# Altium PCB ESC.PcbDoc
Units mm, origin at the board's own origin, x right, y up, seen from the top; angles counter-clockwise.
Board outline 52 x 30 mm, 4 copper layers (Top Layer, Layer 1, Layer 2, Bottom Layer), stack 0.603 mm thick; 61 components, 53 nets, 200 pads, 135 vias.
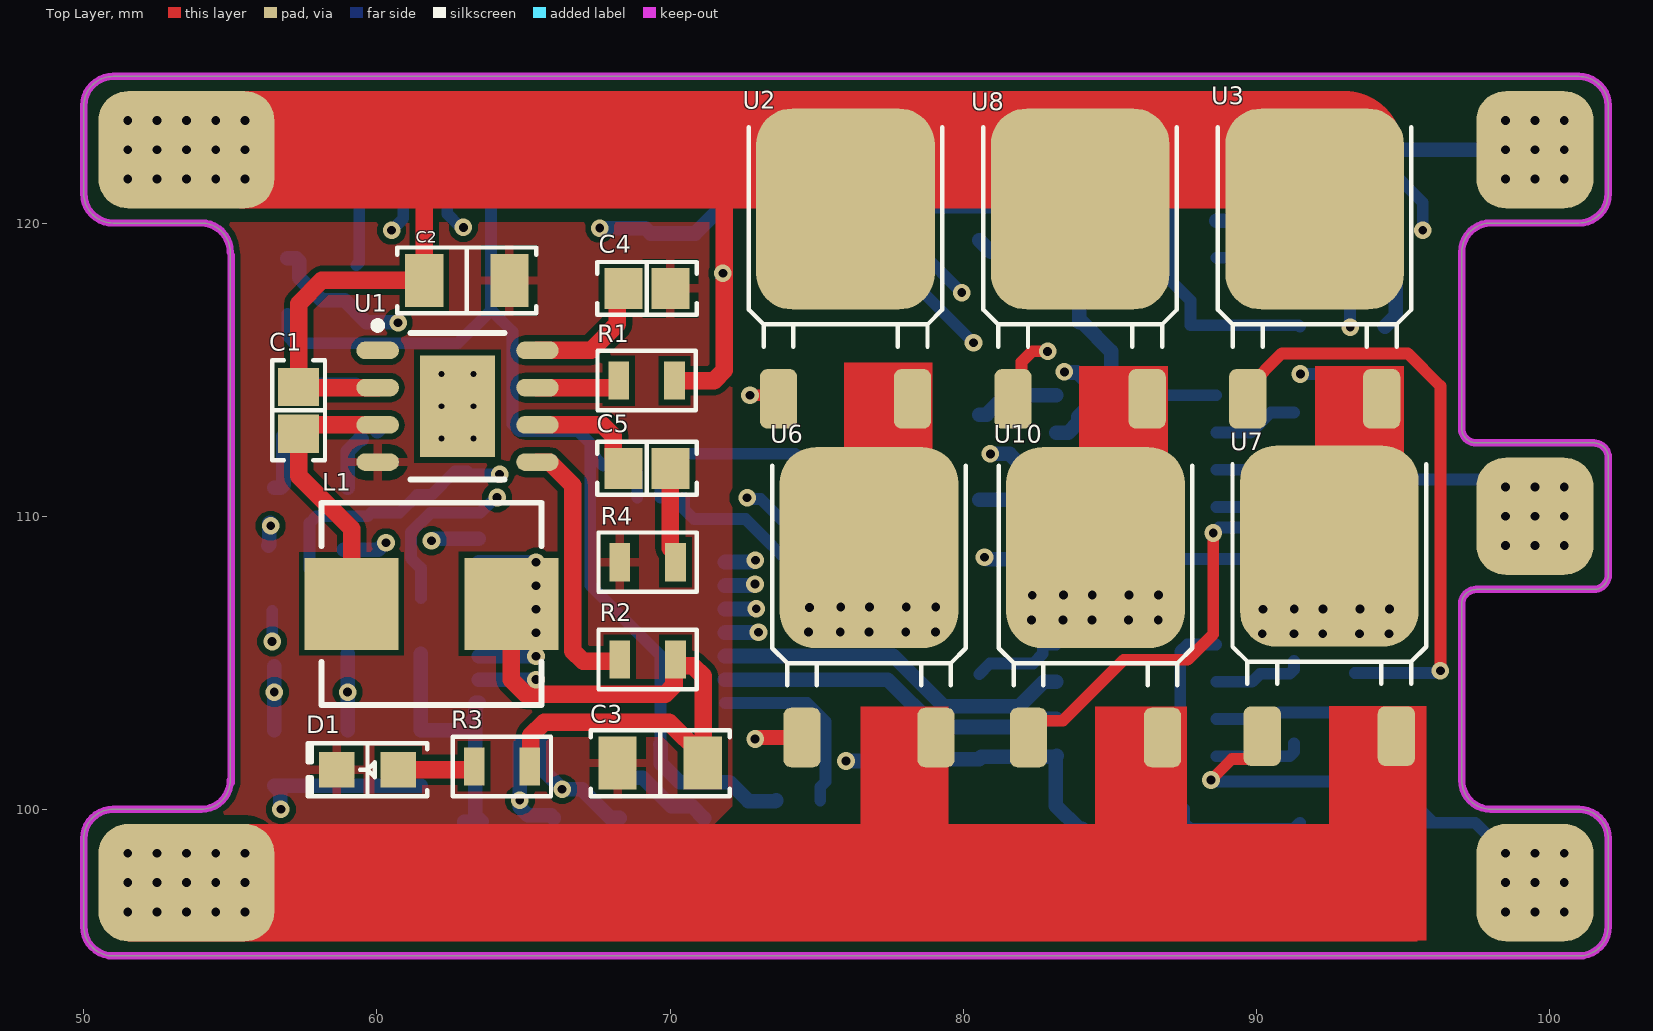
[diagram p0: Top Layer view]
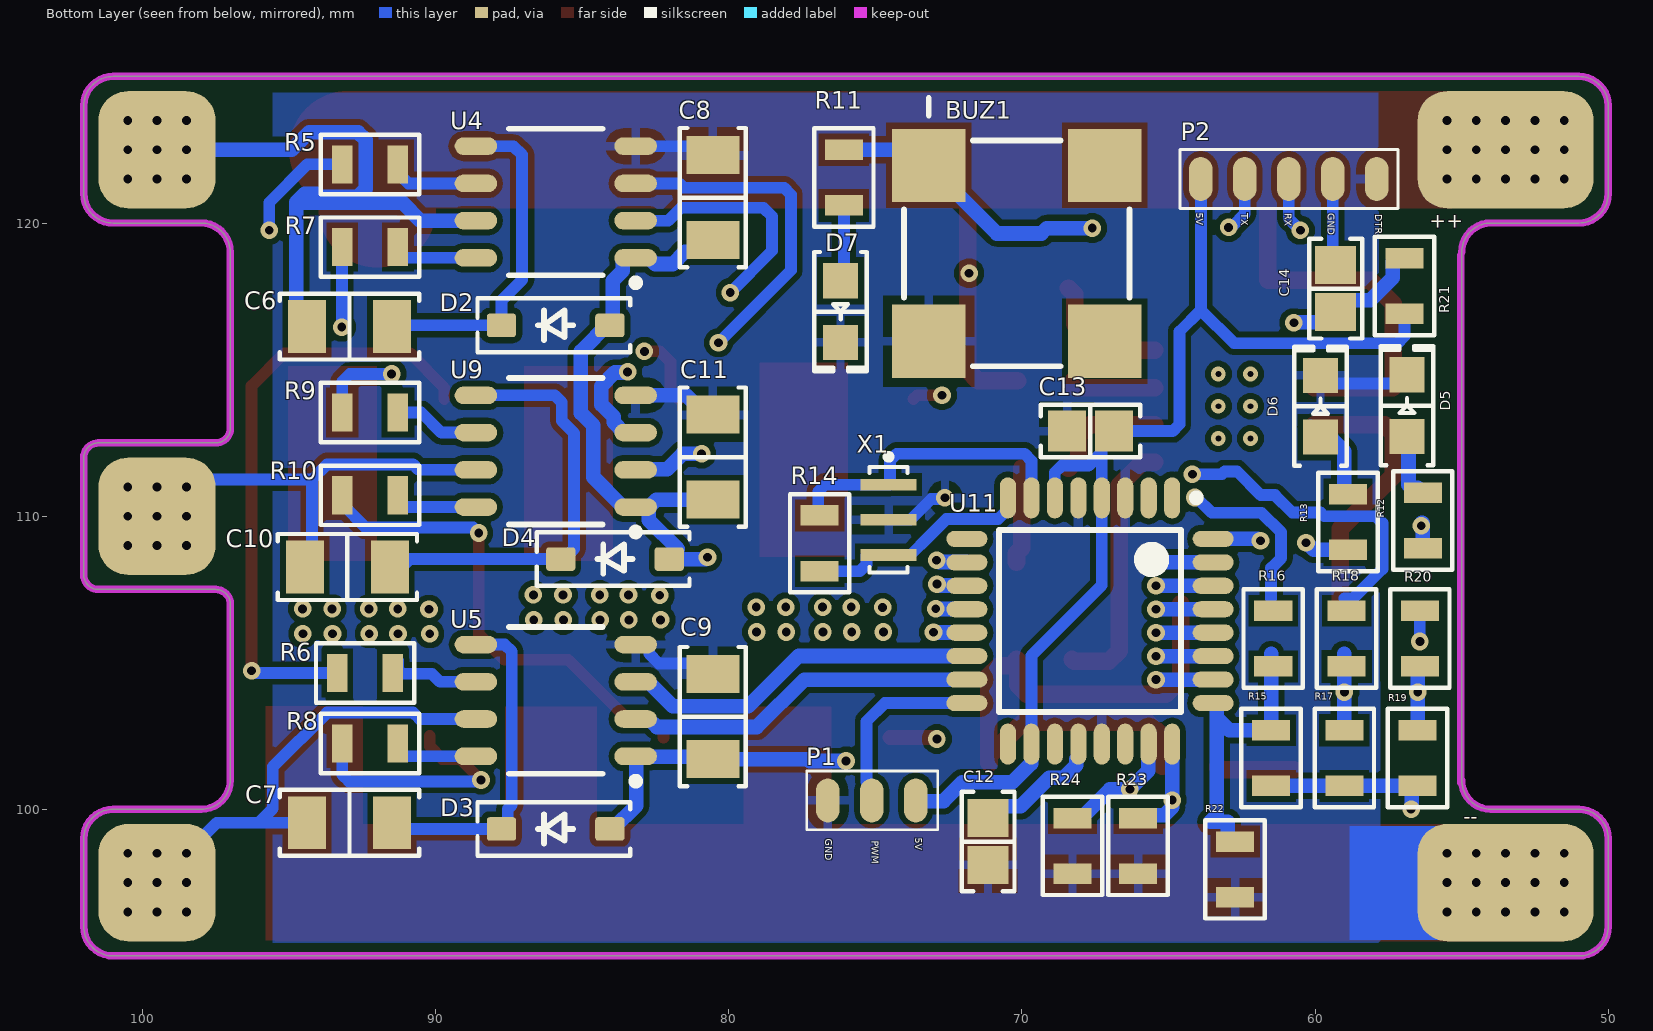
[diagram p1: Bottom Layer view, seen from below]
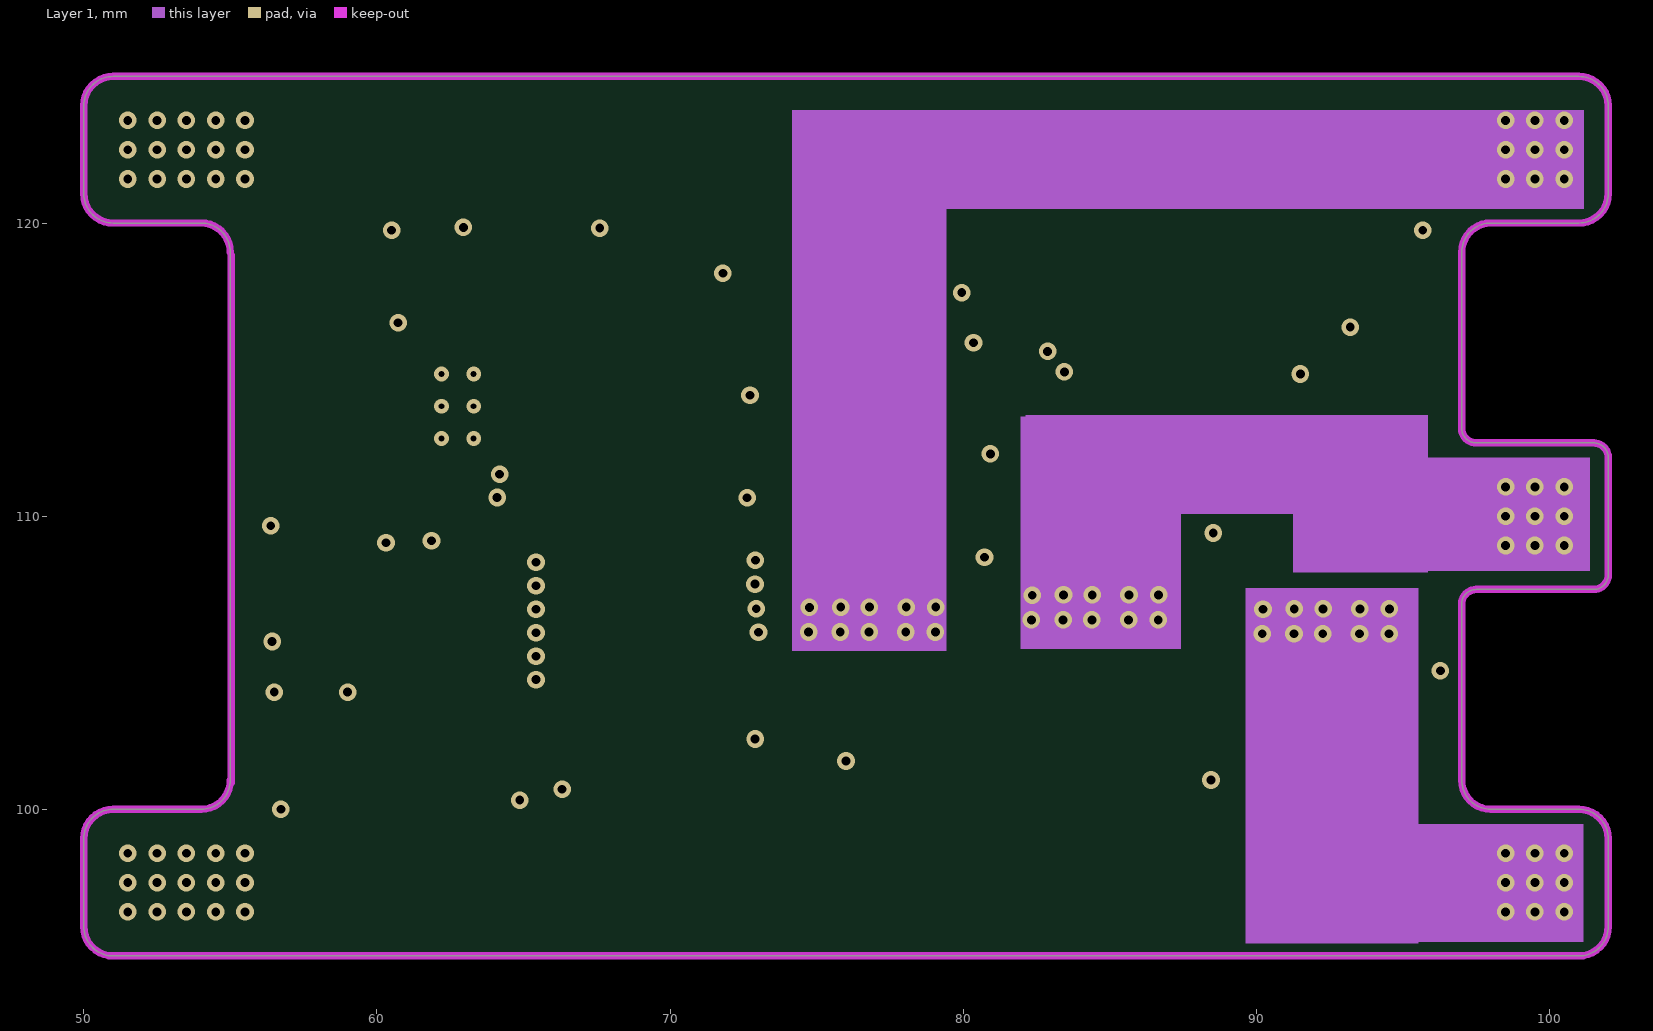
[diagram p2: Layer 1]
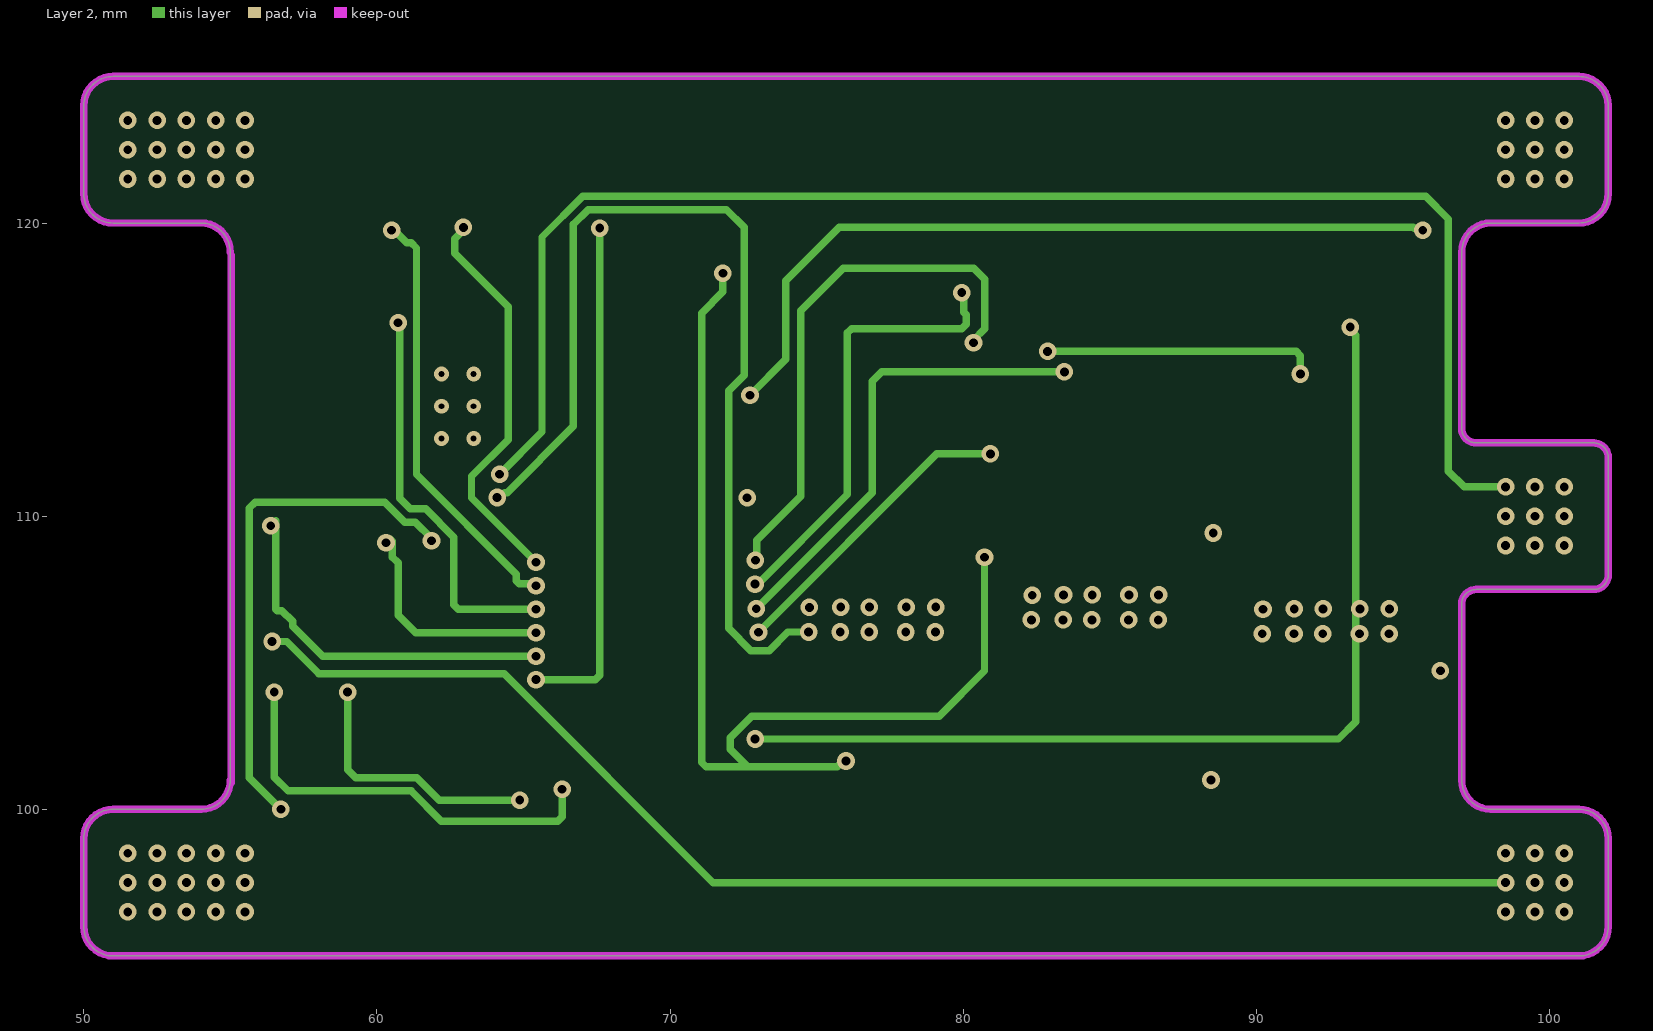
[diagram p3: Layer 2]
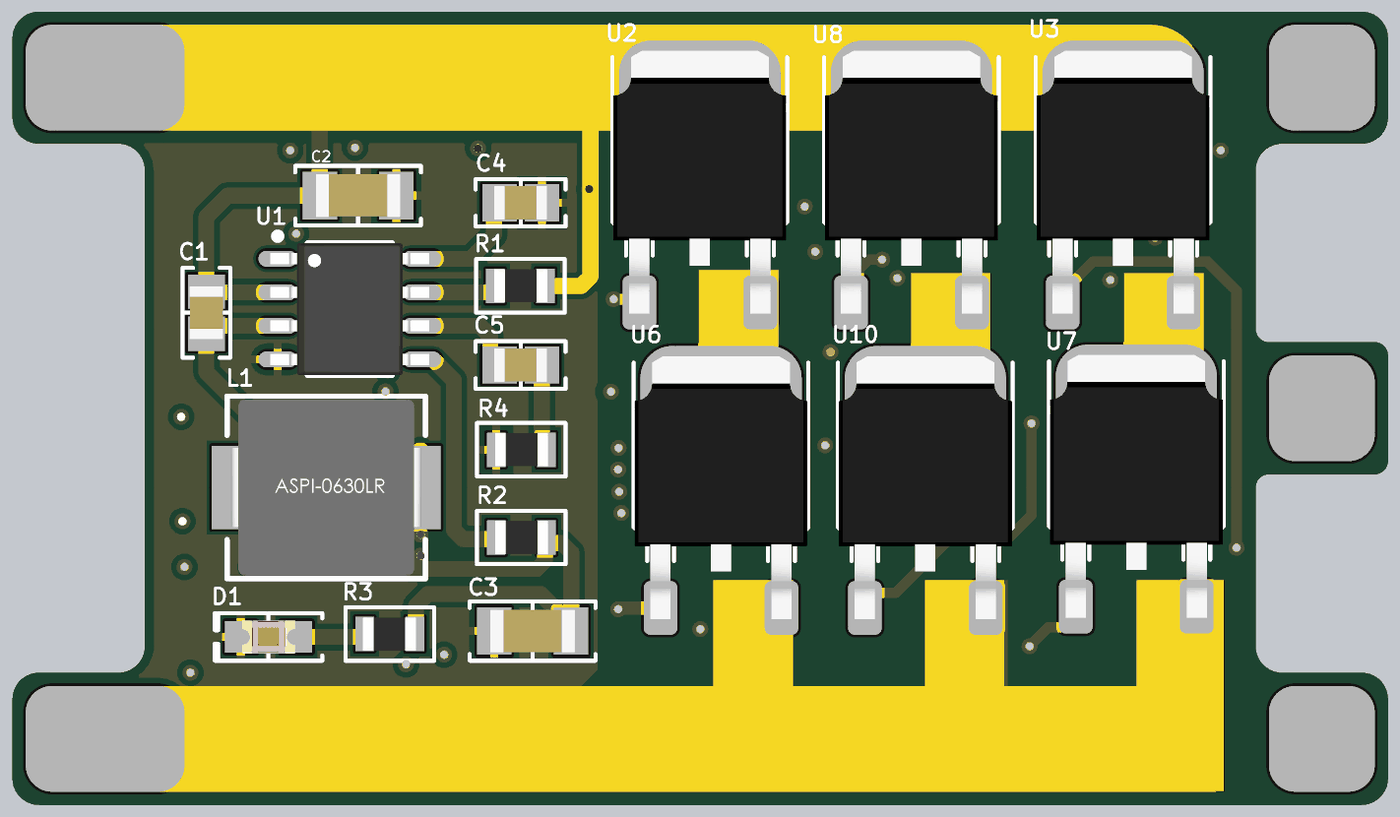
[diagram p4: 3D render of the assembled board from above, using the file's embedded part models]
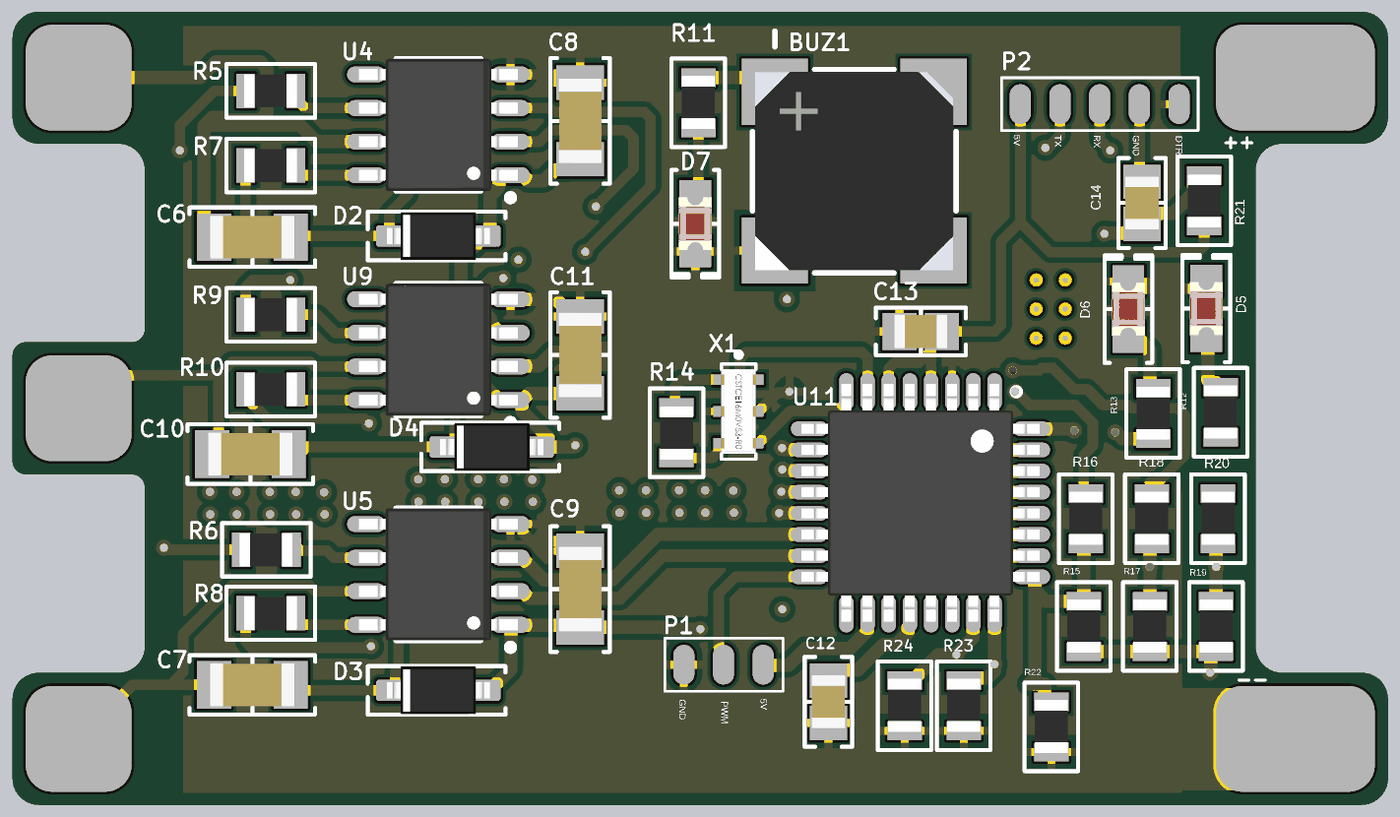
[diagram p5: 3D render of the assembled board from below, using the file's embedded part models]

## Layer stack, top to bottom
Top Solder: solder mask 0.0102, Solder Resist, Dk 3.5
Top Layer: signal copper 0.0356
Dielectric 2: prepreg 0.0711, PP-006, Dk 4.1
Layer 1: signal copper 0.035
Dielectric 1: dielectric 0.32, FR-4, Dk 4.8
Layer 2: signal copper 0.035
Dielectric 3: prepreg 0.0711, PP-006, Dk 4.1
Bottom Layer: signal copper 0.0356
Bottom Solder: solder mask 0.0102, Solder Resist, Dk 3.5

## Board outline
50,96 50,99 cw(c51,99) 51,100 54,100 ccw(c54,101) 55,101 55,119 ccw(c54,119) 54,120 51,120 cw(c51,121) 50,121 50,124 cw(c51,124) 51,125 101,125 cw(c101,124) 102,124 102,121 cw(c101,121) 101,120 98,120 ccw(c98,119) 97,119 97,113 ccw(c97.5,113) 97.5,112.5 101.5,112.5 cw(c101.5,112) 102,112 102,108 cw(c101.5,108) 101.5,107.5 97.5,107.5 ccw(c97.5,107) 97,107 97,101 ccw(c98,101) 98,100 101,100 cw(c101,99) 102,99 102,96 cw(c101,96) 101,95 51,95 cw(c51,96)

## Design rules (kind name [scope] priority, off if disabled: settings)
Clearance "Stitching GND" [IsStitchingVia and InNet('GND') vs (IsVia and (Not IsStitchingVia)) Or IsPad] p1: gap=0.127 ignorepadtopadclearanceinfootprint=FALSE
Clearance [All] p2: gap=0.2 ignorepadtopadclearanceinfootprint=FALSE
PolygonConnect [All] p1: connectstyle=Relief reliefconductorwidth=0.3 reliefentries=4 polygonreliefangle="90 Angle" airgapwidth=0.3
RoutingVias [All] p1: holewidth=0.3 width=0.6 viastyle="Through Hole" minholewidth=0.25 minwidth=0.5 maxholewidth=2.5 maxwidth=5
ShortCircuit [All] p1: allowed=TRUE
SolderMaskExpansion [All] p1: expansion=0.102 istentingtop=FALSE
SupplyNets "Schematic Supply Nets_3" [InNet('+5V')] p1: voltage=0.000
SupplyNets "Schematic Supply Nets_2" [InNet('VCC')] p2: voltage=0.000
SupplyNets "Schematic Supply Nets_1" [InNet('+5')] p3: voltage=0.000
SupplyNets "Schematic Supply Nets" [InNet('GND')] p4: voltage=0.000
Width [All] p1: maxlimit=10 minlimit=0.1 preferedwidth=0.3 midlayer1_minwidth=0.254 midlayer1_maxwidth=0.254 midlayer1_prefwidth=0.254 midlayer2_minwidth=0.254 midlayer2_maxwidth=0.254 midlayer2_prefwidth=0.254 minimp=50.000000 maximp=50.000000 favimp=50.000000
29 further rules are at their usual default settings.

## Classes and differential pairs
component class Power: C1 C2 C3 C4 C5 D1 L1 R1 R2 R3 R4 U1
component class MCU: BUZ1 C12 C13 C14 D5 D6 D7 P1 P2 R11 R12 R13 R14 R15 R16 R17 R18 R19 R20 R21 R22 R23 R24 U11 X1
component class Driver: C6 C7 C8 C9 C10 C11 D2 D3 D4 R5 R6 R7 R8 R9 R10 U2 U3 U4 U5 U6 U7 U8 U9 U10

## Components (designator, comment, footprint, x,y, rotation, side; value= is the part's Value field where it differs from the comment)
BUZ1 "BUZZER MAGN 3.6V 7.5X7.5MM SMD" "BUZ: CMT-7525" 70,119 r270 bottom
C1 "CAP CER 10000PF 50V X7R 0805" CAP-0805(2012) 57.35,113.625 r270 top
C2 "CAP CER 10UF 50V X5R 1206" "CAP 1206/3216" 63,118 r180 top
C3 "CAP CERAMIC 22UF 16V X7S 20% PAD" "CAP 1206/3216" 69.728,101.618 r0 top
C4 "CAP CER 0.1UF 50V X7R 0805" CAP-0805(2012) 69.223,117.75 r180 top
C5 "CAP CER 3900PF 50V X7R 0805" CAP-0805(2012) 69.223,111.613 r180 top
C6 "CAP CER 2.2UF 50V X5R 1206" "CAP 1206/3216" 93,116.427 r0 bottom
C7 "CAP CER 2.2UF 50V X5R 1206" "CAP 1206/3216" 93,99.5 r0 bottom
C8 "CAP CER 10UF 50V X5R 1206" "CAP 1206/3216" 80.5,120.8 r270 bottom
C9 "CAP CER 10UF 50V X5R 1206" "CAP 1206/3216" 80.5,103.095 r270 bottom
C10 "CAP CER 2.2UF 50V X5R 1206" "CAP 1206/3216" 93.075,108.225 r0 bottom
C11 "CAP CER 10UF 50V X5R 1206" "CAP 1206/3216" 80.5,111.948 r270 bottom
C12 "CAP CER 0.1UF 50V X7R 0805" CAP-0805(2012) 71.175,98.887 r90 bottom
C13 "CAP CER 0.1UF 50V X7R 0805" CAP-0805(2012) 67.675,112.925 r180 bottom
C14 "CAP CER 0.1UF 50V X7R 0805" CAP-0805(2012) 59.275,117.775 r270 bottom
D1 "Red 645nm LED Indication - Discrete 1.8V 0805" "SMD: LED 0805/2012 RED" 59.7,101.167 r180 top
D2 "1N4148 Diyot" SOD-123 86,116.5 r0 bottom
D3 "1N4148 Diyot" SOD-123 86,99.32 r0 bottom
D4 "1N4148 Diyot" SOD-123 83.975,108.525 r0 bottom
D5 "Red 645nm LED Indication - Discrete 1.8V 0805" "SMD: LED 0805/2012 RED" 57.05,113.75 r90 bottom
D6 "Red 645nm LED Indication - Discrete 1.8V 0805" "SMD: LED 0805/2012 RED" 60,113.725 r90 bottom
D7 "Red 645nm LED Indication - Discrete 1.8V 0805" "SMD: LED 0805/2012 RED" 76,117 r270 bottom
L1 "FIXED IND 10UH 4A 68 MOHM SMD" ASPI-0630LR-100M-T15 62,107 r0 top
P1 "WR-PHD 2.54 mm Angled Socket Header" PWM_CONN 75.025,100.275 r0 bottom
P2 "WR-PHD 2.54 mm Angled Socket Header" TTL_CONN_5 61.006,121.489 r180 bottom
R1 "RES SMD 100K OHM 1% 1/8W 0805" RES-0805 68.25,114.625 r0 top
R2 "RES SMD 44.2K OHM 1% 1/8W 0805" RES-0805 68.284,105.112 r0 top
R3 "RES SMD 100 OHM 1% 1/8W 0805" RES-0805 65.215,101.467 r180 top
R4 "RES SMD 6.8K OHM 1% 1/8W 0805" RES-0805 68.284,108.428 r0 top
R5 "RES SMD 100 OHM 1% 1/8W 0805" RES-0805 91.284,122 r0 bottom
R6 "RES SMD 100 OHM 1% 1/8W 0805" RES-0805 91.452,104.65 r0 bottom
R7 "RES SMD 100 OHM 1% 1/8W 0805" RES-0805 91.284,119.179 r0 bottom
R8 "RES SMD 100 OHM 1% 1/8W 0805" RES-0805 91.284,102.252 r0 bottom
R9 "RES SMD 100 OHM 1% 1/8W 0805" RES-0805 91.284,113.536 r0 bottom
R10 "RES SMD 100 OHM 1% 1/8W 0805" RES-0805 91.284,110.715 r0 bottom
R11 "RES SMD 100 OHM 1% 1/8W 0805" RES-0805 76.071,120.6 r90 bottom
R12 "RES SMD 100 OHM 1% 1/8W 0805" RES-0805 56.325,108.9 r90 bottom
R13 "RES SMD 100 OHM 1% 1/8W 0805" RES-0805 58.875,108.85 r90 bottom
R14 "RES SMD 10K OHM 1% 1/8W 0805" RES-0805 76.9,110.025 r270 bottom
R15 "RES SMD 33K OHM 1% 1/8W 0805" RES-0805 61.5,100.8 r90 bottom
R16 "RES SMD 33K OHM 1% 1/8W 0805" RES-0805 61.425,104.875 r90 bottom
R17 "RES SMD 33K OHM 1% 1/8W 0805" RES-0805 59,100.8 r90 bottom
R18 "RES SMD 33K OHM 1% 1/8W 0805" RES-0805 58.925,104.875 r90 bottom
R19 "RES SMD 33K OHM 1% 1/8W 0805" RES-0805 56.5,100.8 r90 bottom
R20 "RES SMD 33K OHM 1% 1/8W 0805" RES-0805 56.425,104.875 r90 bottom
R21 "RES SMD 10K OHM 1% 1/8W 0805" RES-0805 56.95,118.8 r270 bottom
R22 "RES SMD 10K OHM 1% 1/8W 0805" RES-0805 62.725,97 r90 bottom
R23 "RES SMD 10K OHM 1% 1/8W 0805" RES-0805 66.035,97.803 r90 bottom
R24 "RES SMD 10K OHM 1% 1/8W 0805" RES-0805 68.275,97.803 r90 bottom
U1 "IC REG BUCK ADJ 3A 8SOIC" SOIC8-PAD 62.75,113.75 r0 top
U2 "MOSFET N-CH 30V 161A DPAK" DPAK 76,118 r90 top
U3 "MOSFET N-CH 30V 161A DPAK" DPAK 92,118 r90 top
U4 "IC GATE DRVR HALF-BRIDGE 8SOIC" SOIC8 86,121 r0 bottom
U5 "IC GATE DRVR HALF-BRIDGE 8SOIC" SOIC8 86,104 r0 bottom
U6 "MOSFET N-CH 30V 161A DPAK" DPAK 76.8,106.45 r90 top
U7 "MOSFET N-CH 30V 161A DPAK" DPAK 92.5,106.5 r90 top
U8 "MOSFET N-CH 30V 161A DPAK" DPAK 84,118 r90 top
U9 "IC GATE DRVR HALF-BRIDGE 8SOIC" SOIC8 86,112.5 r0 bottom
U10 "MOSFET N-CH 30V 161A DPAK" DPAK 84.525,106.45 r90 top
U11 "IC MCU 8BIT 32KB FLASH 32TQFP" TQFP32 67.675,106.425 r270 bottom
X1 "CERAMIC RES 16.0000MHZ 15PF SMD" CRYSTAL_16MHZ(CTSE16) 74.577,109.664 r270 bottom

## Footprints (in the part's own frame and the unit in brackets; to place one, negate y for a bottom-side part, rotate by r counter-clockwise, add the part's x,y. Pads: shape width x height; smd on the part's side, far side on the other; paste and mask are expansions set on the pad)
ASPI-0630LR-100M-T15 [mm]
  rect 3.2x3.15 smd: 1(-2.865,0.006) 2(2.585,0.006)
  silkscreen extent -3.89,-3.44 3.61,3.46, body extent -3.74,-3.32 3.46,3.33, height 3
"BUZ: CMT-7525" [mm]
  rect 2.5x2.5 smd: 0(-2.965,2.822) 0(3.035,2.822) 1(-2.965,-3.178) 2(3.035,-3.178)
  silkscreen extent -5.26,-4.03 3.89,3.67, body extent -3.71,-3.93 3.79,3.57, height 2.5
"CAP 1206/3216" [mm] "Chip Capacitor, 2-Leads, Body 3.25x1.60mm, IPC Medium Density"
  rect 1.3x1.8 smd: 1(-1.516,-0.041) 2(1.384,-0.041)
  silkscreen extent -2.44,-1.17 2.31,1.08, body extent -1.67,-0.85 1.53,0.77, height 1.62
CAP-0805(2012) [mm] "Chip Capacitor, 2-Leads, Body 2.00x1.20mm, IPC Medium Density"
  rect 1.3x1.4 smd: 1(-0.787,-0.021) 2(0.813,-0.021)
  silkscreen extent -1.69,-0.92 1.71,0.88, body extent -0.99,-0.66 1.01,0.62, height 1.26
CRYSTAL_16MHZ(CTSE16) [mm]
  rect 0.4x1.9 smd: 1(-1.411,0.027) 2(-0.211,0.027) 3(0.989,0.027)
  silkscreen extent -2.46,-0.62 1.59,0.68, body extent -1.81,-0.62 1.39,0.68, height 0.9
DPAK [mil]
  rrect40% 80x50 smd: 1(-157.48,90.55) 3(-157.48,-89.45)
  rrect40% 270x240 smd: 4(97.52,0.55)
  silkscreen extent -87,-129 208,131, body extent -174,-128 217,129, height 91
PWM_CONN [mm]
  oval 0.8x1.5 smd: 1(-1.406,-0.029) 2(0.094,-0.029) 3(1.594,-0.029)
  silkscreen extent -2.15,-1.03 2.31,0.97
RES-0805 [mm]
  rect 0.7x1.3 smd: 1(0,0) 2(1.9,0)
  silkscreen extent -0.72,-1.01 2.63,1.01, body extent -0.04,-0.62 1.96,0.63, height 0.6
"SMD: LED 0805/2012 RED" [mm] "Chip Diode, 2-Leads, Body 2.00x1.25mm, IPC Medium Density"
  rect 1.2x1.2 smd: 1(-1.028,-0.186) 2(1.072,-0.186)
  silkscreen extent -2.01,-1.09 2.05,0.71, body extent -0.98,-0.81 1.02,0.44, height 0.9
SOD-123 [mm] "SOD, 2-Leads, Body 1.55x3.70mm, IPC Medium Density"
  rrect25% 1x0.8 smd: 1(-1.947,-0.011) 2(1.753,-0.011)
  silkscreen extent -2.64,-0.93 2.57,0.9, body extent -2.05,-0.91 1.85,0.89, height 1.18
SOIC8 [mm] "SOIC, 8-Leads, Body 4,90x3,90mm, Pitch 1,27mm, Thermal Pad 3,45x2,56mm, IPC Low Density"
  oval 1.45x0.6 smd: 1(-2.825,2.189) 2(-2.825,0.919) 3(-2.825,-0.351) 4(-2.825,-1.621) 5(2.625,-1.621) 6(2.625,-0.351) 7(2.625,0.919) 8(2.625,2.189)
  silkscreen extent -2.95,-2.22 1.5,3.16, body extent -3.1,-2.22 2.9,2.78, height 1.7
SOIC8-PAD [mm] "SOIC, 8-Leads, Body 4,90x3,90mm, Pitch 1,27mm, Thermal Pad 3,45x2,56mm, IPC Low Density"
  oval 1.45x0.6 smd: 1(-2.725,1.905) 2(-2.725,0.635) 3(-2.725,-0.635) 4(-2.725,-1.905) 5(2.725,-1.905) 6(2.725,-0.635) 7(2.725,0.635) 8(2.725,1.905)
  rect 2.56x3.45 smd: 9(0,0)
  silkscreen extent -2.85,-2.5 1.6,2.88, body extent -3,-2.5 3,2.5, height 1.7
TQFP32 [mm] "TQFP, 32-Leads, Body 7,00x7,00mm, Pitch 0,80mm, IPC Medium Density"
  oval 1.4x0.55 smd: 1(-4.2,2.8) 2(-4.2,2) 3(-4.2,1.2) 4(-4.2,0.4) 5(-4.2,-0.4) 6(-4.2,-1.2) 7(-4.2,-2) 8(-4.2,-2.8) 17(4.2,-2.8) 18(4.2,-2) 19(4.2,-1.2) 20(4.2,-0.4) 21(4.2,0.4) 22(4.2,1.2) 23(4.2,2) 24(4.2,2.8)
  oval 0.55x1.4 smd: 9(-2.8,-4.2) 10(-2,-4.2) 11(-1.2,-4.2) 12(-0.4,-4.2) 13(0.4,-4.2) 14(1.2,-4.2) 15(2,-4.2) 16(2.8,-4.2) 25(2.8,4.2) 26(2,4.2) 27(1.2,4.2) 28(0.4,4.2) 29(-0.4,4.2) 30(-1.2,4.2) 31(-2,4.2) 32(-2.8,4.2)
  silkscreen extent -4.32,-3.1 3.1,3.75, body extent -4.5,-4.5 4.5,4.5, height 1.2
TTL_CONN_5 [mm]
  oval 0.8x1.5 smd: 1(-2.894,0.011) 2(-1.394,0.011) 3(0.106,0.011) 4(1.606,0.011) 5(3.106,0.011)
  silkscreen extent -3.61,-0.99 3.83,1.01

## Part data
BUZ1: library part Buzzer(CMT-7525-80-SMT-TR), "Buzzers Transducer, Externally Driven Magnetic 3.6V 100mA 2.73kHz 80dB @ 3.6V, 10cm Surface Mount Solder Pads", +Sicaklik=+85, -Sicaklik=-40, Cins=Buzzer, Deger=Buzzer, Kılıf=Nonstandard, Lehim Yöntemi=SMD, MSL="1 (Unlimited)", Uretici Kodu=CMT-7525-80-SMT-TR
C1: library part "10nF 50V 0805", "10000pF ±10% 50V Ceramic Capacitor X7R 0805 (2012 Metric)", +Sicaklik=+125, -Sicaklik=-55, Cins=Kondansator, Deger="10nF 50V", Kılıf=0805, Lehim Yöntemi=SMD, MSL="1 (Unlimited)", Uretici Kodu=CL21B103KBANNNC
C2 C8 C9 C11: library part "10uF 50V 1206", "10µF ±10% 50V Ceramic Capacitor X5R 1206 (3216 Metric)", +Sicaklik=+125, -Sicaklik=-55, Cins=Kondansator, Deger="10uF 50V", Kılıf=1206, Lehim Yöntemi=SMD, MSL="1 (Unlimited)", Uretici Kodu=CL31A106KBHNNNE
C3: library part "22uF 16V 1206", "22µF ±20% 16V Ceramic Capacitor X7S 1206 (3216 Metric)", +Sicaklik=+125, -Sicaklik=-55, Cins=Kondansator, Deger="22uF 16V", Kılıf=1206, Lehim Yöntemi=SMD, MSL="1 (Unlimited)", Uretici Kodu=GRM31CC71C226ME11L
C4 C12 C13 C14: library part "100nF 50V 0805", "0.1 µF ±10% 50V Ceramic Capacitor X7R 0805 (2012 Metric)", Cins=kondansatör, Deger="100 nF 50V", Kılıf=0805, Lehim Yöntemi=smd, MSL="1 (Unlimited)", sıcaklık +=+125, sıcaklık -=-55, üretici kodu=CL21B104KBCNNNC
C5: library part "3.9nF 50V 0805", "3900pF ±10% 50V Ceramic Capacitor X7R 0805 (2012 Metric)", +Sicaklik=+125, -Sicaklik=-55, Cins=Kondansator, Deger="3.9nF 50V", Kılıf=0805, Lehim Yöntemi=SMD, MSL="1 (Unlimited)", Uretici Kodu=CL21B392KBANNNC
C6 C7 C10: library part "2.2uF 50V 1206", "2.2µF ±10% 50V Ceramic Capacitor X5R 1206 (3216 Metric)", +Sicaklik=+85, -Sicaklik=-55, Cins=Kondansator, Deger="2.2uF 50V", Kılıf=1206, Lehim Yöntemi=SMD, MSL="1 (Unlimited)", Uretici Kodu=CL31A225KBHNNNE
D1 D5 D6 D7: library part LED_Kırmızı, "LED RED DIFFUSED 0805 SMD", +Sicaklik=+125, -Sicaklik=-40, Cins=LED, Deger="KIRMIZI LED", Kılıf=0805, Lehim Yöntemi=SMD, MSL="1 (Unlimited)", Uretici Kodu="LH R974-LP-1"
D2 D3 D4: library part 1N4148, "DIODE GEN PURP 100V 150MA SOD123", +Sicaklik=+150, -Sicaklik=-65, Cins=Diyot, Deger=1N4148, Kılıf=SOD123, Lehim Yöntemi=SMD, MSL="1 (Unlimited)", Uretici Kodu=1N4148W-TP
L1: library part "10uH 4A", "10µH Shielded Molded Inductor 4A 68mOhm Max Nonstandard", +Sicaklik=+125, -Sicaklik=-55, Cins=Bobin, Deger="10uH 4A", Kılıf=Nonstandard, Lehim Yöntemi=SMD, MSL="1 (Unlimited)", Uretici Kodu=ASPI-0630LR-100M-T15
P1: library part HDR(1X3), +Sicaklik=+105, -Sicaklik=-40, Cins=Konnektor, Kılıf="3POS 2.54MM", Lehim Yöntemi=MANUEL, MSL="1 (Unlimited)", Uretici Kodu=613003143121
P2: library part HDR(1X5), +Sicaklik=+105, -Sicaklik=-40, Cins=Konnektor, Kılıf="5POS 2.54MM", Lehim Yöntemi=MANUEL, MSL="1 (Unlimited)", Uretici Kodu=613005143121
R1: library part "100K 0805", "100 kOhms ±1% 0.125W, 1/8W Chip Resistor 0805 (2012 Metric) Moisture Resistant Thick Film", +Sicaklik=+155, -Sicaklik=-55, Cins=Direnc, Deger=100K, Kılıf=0805, Lehim Yöntemi=SMD, MSL="1 (Unlimited)", Uretici Kodu=RC0805FR-07100KL
R2: library part "44.2K 0805", "44.2 kOhms ±1% 0.125W, 1/8W Chip Resistor 0805 (2012 Metric) Moisture Resistant Thick Film", +Sicaklik=+155, -Sicaklik=-55, Cins=Direnc, Deger=44.2k, Kılıf=0805, Lehim Yöntemi=SMD, MSL="1 (Unlimited)", Uretici Kodu=RC0805FR-0744K2L
R3 R5 R6 R7 R8 R9 R10 R11 R12 R13: library part "100R 0805", "100 Ohms ±1% 0.125W, 1/8W Chip Resistor 0805 (2012 Metric) Moisture Resistant Thick Film", +Sicaklik=+155, -Sicaklik=-55, Cins=Direnc, Deger=100R, Kılıf=0805, Lehim Yöntemi=SMD, MSL="1 (Unlimited)", Uretici Kodu=RC0805FR-07100RL
R4: library part "6.8K 0805", "6.8 kOhms ±1% 0.125W, 1/8W Chip Resistor 0805 (2012 Metric) Moisture Resistant Thick Film", +Sicaklik=+155, -Sicaklik=-55, Cins=Direnc, Deger=6.8K, Kılıf=0805, Lehim Yöntemi=SMD, MSL="1 (Unlimited)", Uretici Kodu=RC0805FR-076K8L
R14 R21 R22 R23 R24: library part "10K 0805", "10 kOhms ±1% 0.125W, 1/8W Chip Resistor 0805 (2012 Metric) Moisture Resistant Thick Film", +Sicaklik=+155, -Sicaklik=-55, Cins=Direnc, Deger=10K, Kılıf=0805, Lehim Yöntemi=SMD, MSL="1 (Unlimited)", Uretici Kodu=RC0805FR-0710KL
R15 R16 R17 R18 R19 R20: library part "33K 0805", "33 kOhms ±1% 0.125W, 1/8W Chip Resistor 0805 (2012 Metric) Moisture Resistant Thick Film", +Sicaklik=+155, -Sicaklik=-55, Cins=Direnc, Deger=33K, Kılıf=0805, Lehim Yöntemi=SMD, MSL="1 (Unlimited)", Uretici Kodu=RC0805FR-0733KL
U1: library part MP2307DN, "Buck Switching Regulator IC Positive Adjustable 0.925V 1 Output 3A 8-SOIC (0.154\", 3.90mm Width) Exposed Pad", Cins=IC, Deger=MP2307DN, Kılıf=8-SOIC, Lehim Yöntemi=SMD, MSL="2A(4 weeks)", sıcaklık=-40, sıcaklık +=+85, Üretici Kodu=MP2307DN-LF-Z
U2 U3 U6 U7 U8 U10: library part IRLR7843, "N-Channel 30V 161A (Tc) 140W (Tc) Surface Mount D-Pak", +Sicaklik=+175, -Sicaklik=-55, Cins=MOSFET, Deger=IRLR7843TRPBF, Kılıf=DPAK(TO-252-3), Lehim Yöntemi=SMD, MSL="1 (Unlimited)", Uretici Kodu=IRLR7843TRPBF
U4 U5 U9: library part IR2101, "Half-Bridge Gate Driver IC Non-Inverting 8-SOIC", Cins=IC, Deger=IR2101STRPBF, Kılıf=SOIC8, Lehim Yöntemi=SMD, MSL="2 (1 Year)", sıcaklık -=-40, sıcaklık+=+150, üretici kodu=IR2101STRPBF
U11: library part ATMEGA328P, "AVR AVR® ATmega Microcontroller IC 8-Bit 20MHz 32KB (16K x 16) FLASH 32-TQFP (7x7)", Cins=IC, Deger=ATMEGA328P, Kılıf=TQFP32, Lehim Yöntemi=SMD, MSL="3 (168 Hours)", sıcaklık+=+85, sıcaklık-=-40, Üretici Kodu=ATMEGA328P-AUR
X1: library part "CRYSTAL 16.0000MHZ(CSTCE16M0V53-R0)", "16MHz Ceramic Resonator Built in Capacitor 15pF ±0.3%  -20°C ~ 80°C Surface Mount", +Sicaklik=+80, -Sicaklik=-20, Cins=Kristal, Deger="16 MHZ 15PF", Kılıf=3-SMD, Lehim Yöntemi=SMD, MSL="1 (Unlimited)", Uretici Kodu=CSTCE16M0V53-R0

## Free pads (board coordinates)
  rrect50% 6x4 smd: ""(53.5,97.5) ""(53.5,122.5)
  rrect50% 6x4 smd far side: ""(53.5,97.5) ""(53.5,122.5)
  rrect50% 4x4 smd: ""(99.5,97.5) ""(99.5,110) ""(99.5,122.5)
  rrect50% 4x4 smd far side: ""(99.5,97.5) ""(99.5,110) ""(99.5,122.5)

## Via types
v1: diameter 0.6, hole 0.3, Top Layer to Bottom Layer, tented both sides, 129 vias
v2: diameter 0.5, hole 0.2, Top Layer to Bottom Layer, 6 vias

## Nets (pads, with @x,y where several pads share a name; then routed paths per layer and width w, separated by ;. In a path a pad name is that pad's centre, name@x,y a point inside that pad or via, vN(x,y) a via of type N, cw(c..) or ccw(c..) an arc to the next point about the centre after c; other vN are vias at no path point)
+5: C3.2 L1.2 R2.2 R3.1 | length 21.5
  Top Layer w0.6: L1.2 64.585,104.415 65.075,103.925 69.832,103.925 70.134,104.226 70.134,105.062 R2.2 70.184,104.95 70.234,104.9 70.774,104.9 71.125,104.549 71.125,101.59 C3.2 71.112,101.827 69.962,102.977 65.702,102.977 65.25,102.525 65.25,101.502 R3.1
+5V: C13.2 P1.1 P2.1 R21.2 U11.4 U11.6 U11.18 | length 39
  Bottom Layer w0.4: R21.2 56.95,116.134 57.184,115.9 62.763,115.9 63.894,117.031 ; P2.1@63.894,121.511 63.894,117.031 ; U11.6 68.875,111.491 68.641,111.725 67.725,111.725 67.275,112.175 ; U11.18 69.675,105.239 67.275,107.639 U11.4 67.275,112.175 ; 63.894,117.031 64.625,116.3 64.625,113.138 64.859,112.904 C13.2 67.275,112.491 67.275,112.175
  Bottom Layer w0.5: U11.18 69.685,102.215 69.685,101.565 70.33,100.92 72.03,100.92 72.675,100.275 73.591,100.275 P1.1
A0: R19.2 R20.1 R24.2 U11.23 | length 20.7
  Layer 2 w0.254: v1(56.5,104) 56.5,101.1 56.973,100.627 61.173,100.627 62.2,99.6 66.167,99.6 66.316,99.749 v1(66.316,100.684)
  Bottom Layer w0.5: R19.2 v1(56.5,104) R20.1@56.5,104.875 ; U11.23 65.685,102.215 65.685,101.315 v1(66.316,100.684) 66.994,100.684 67.975,99.703 R24.2
A1: R17.2 R18.1 R23.2 U11.24 | length 14.8
  Layer 2 w0.254: v1(59,104) 59,101.356 59.275,101.081 61.361,101.081 62.125,100.317 v1(64.875,100.317)
  Bottom Layer w0.5: R17.2 v1(59,104) 59,105.3 ; v1@64.875,100.075 65.147,99.803 65.935,99.803 R23.2 ; v1(64.875,100.317) U11.24
A2: R15.2 R16.1 R22.2 U11.25 | length 10.3
  Bottom Layer w0.5: 61.5,105.3 R15.2 62.932,102.7 63.35,103.118 ; R22.2 62.877,98.9 62.977,99 62.977,99.575 63.578,99.575 63.35,99.803 63.35,103.118 ; U11.25 63.373,103.625 63.35,103.602 63.35,103.118
BUZZ: BUZ1.1 R11.2 U11.26 | length 29.2
  Layer 2 w0.254: v1(65.425,104.425) 67.451,104.425 67.6,104.574 v1(67.6,119.825)
  Bottom Layer w0.5: U11.26 v1(65.425,104.425) ; v1(67.6,119.825) 69.152,119.825 69.332,119.644 70.857,119.644 BUZ1.1 73.713,122.5 R11.2
DTR: C14.1 P2.4 | length 3
  Bottom Layer w0.4: C14.1 59.394,118.66 P2.4@59.394,121.511
FAZ_1: C6.2 pad.@99.5,122.5 R16.2 U2.3 U4.7 U6.4 | length 61.4
  Layer 2 w0.254: v1(64.1,110.637) 64.194,110.637 64.362,110.805 64.442,110.805 66.7,113.063 66.7,119.95 67.202,120.452 71.923,120.452 72.525,119.85 72.525,114.812 71.998,114.285 71.998,106.172 72.757,105.413 73.375,105.413 74.013,106.05 v1(74.725,106.05)
  Bottom Layer w0.4: 61.5,107.2 61.5,108.23 61.16,108.57 61.16,109.45 61.828,110.118 63.528,110.118 64.046,110.637 v1(64.1,110.637)
  Bottom Layer w0.5: U4.7 90.519,120.081 91.139,120.701 94.755,120.701 ; C6.2 94.755,116.839 94.755,120.701 ; v1(98.5,122.5) 94.911,122.5 94.311,123.1 92.647,123.1 92.384,122.836 92.384,121.164 92.647,120.9 93.954,120.9 94.048,120.994 94.462,120.994 94.755,120.701
  other v1: 75.806,106.05 76.787,106.05 78.041,106.05 79.05,106.05 74.751,106.887 75.819,106.9 76.8,106.9 78.054,106.9 79.063,106.9 98.5,121.5 99.5,121.5 100.5,121.5 99.5,122.5 100.5,122.5 98.5,123.5 99.5,123.5 100.5,123.5
FAZ_2: C10.2 pad.@99.5,110 R18.2 U8.3 U9.7 U10.4 | length 75.4
  Layer 2 w0.254: v1(64.182,111.432) 65.631,112.881 65.631,119.523 67.014,120.906 95.769,120.906 96.55,120.125 96.55,119.606 96.546,119.602 96.546,111.539 97.085,111 v1(98.5,111)
  Bottom Layer w0.4: 59,107.2 58.7,107.2 57.7,108.2 57.7,109.766 57.934,110 59.691,110 59.816,110.125 60.775,110.125 61.368,110.718 61.857,110.718 62.663,111.525 63.082,111.525 63.175,111.432 v1(64.182,111.432) ; U9.7 90.584,111.581 90.768,111.765 93.7,111.765 94.215,111.25 ; C10.2@94.015,108.324 C10.2@94.184,108.154 ; C10.2@94.215,108.174 94.215,111.25 ; v1(98.5,111) 98.25,111.25 94.215,111.25
  other v1: 82.324,106.463 83.406,106.463 84.387,106.463 85.641,106.463 86.649,106.463 82.35,107.3 83.418,107.313 84.399,107.313 85.653,107.313 86.662,107.313 98.5,109 99.5,109 100.5,109 98.5,110 99.5,110 100.5,110 99.5,111 100.5,111
FAZ_3: C7.2 pad.@99.5,97.5 R20.2 U3.3 U5.7 U7.4 | length 61
  Layer 2 w0.254: v1(56.425,105.725) 56.925,105.725 58.023,104.627 64.336,104.627 71.463,97.5 v1(98.5,97.5)
  Bottom Layer w0.4: v1(56.425,105.725) R20.2 ; U5.7 90.548,103.081 90.768,103.302 93.7,103.302 95.55,101.451 95.55,100.025 96.034,99.541 ; C7.2 96.034,99.541 ; v1(98.5,98.5) 97.459,99.541 96.034,99.541
  other v1: 98.5,96.5 99.5,96.5 100.5,96.5 99.5,97.5 100.5,97.5 99.5,98.5 100.5,98.5 90.199,105.988 91.281,105.988 92.262,105.988 93.516,105.988 94.524,105.988 90.225,106.825 91.293,106.838 92.274,106.838 93.528,106.838 94.537,106.838
GND: BUZ1.2 C2.1 C3.1 C4.1 C8.1 C9.1 C11.1 C12.1 C13.1 D1.2 D5.2 D6.2 D7.2 P1.3 P2.5 pad.@53.5,97.5 R4.1 R22.1 R23.1 R24.1 U1.4 U4.4 U5.4 U6.3 U7.3 U9.4 U10.3 U11.3 U11.5 U11.21 X1.2 | length 13.6
  Bottom Layer w0.4: D5.2 57.164,114.522 D6.2@59.289,114.522 ; v1(72.625,110.625) 72.663,110.587 73.088,110.587 73.8,109.875 X1.2 ; C9.1 80.905,104.975 82.384,104.975 82.712,105.303 82.712,105.529 82.804,105.621 U5.4 ; C8.1 80.846,122.621 U4.4
  Bottom Layer w0.5: C11.1 80.791,113.464 81.448,114.121 U9.4
  other v1: 51.5,96.5 52.5,96.5 53.5,96.5 54.5,96.5 55.5,96.5 51.5,97.5 52.5,97.5 53.5,97.5 54.5,97.5 55.5,97.5 51.5,98.5 52.5,98.5 53.5,98.5 54.5,98.5 55.5,98.5
H_1: U4.2 U11.11 | length 24.4
  Layer 2 w0.254: v1(72.897,107.684) 72.984,107.684 76.05,110.75 76.05,116.251 76.199,116.4 79.951,116.4 80.1,116.549 80.1,116.873 80.016,116.957 80.016,117.559 v1(79.95,117.625)
  Bottom Layer w0.4: v1(79.95,117.625) 78.525,119.05 78.525,120.223 78.818,120.516 81.627,120.516 82.062,120.081 U4.2
  Bottom Layer w0.5: U11.11 71.885,107.635 72.821,107.635 72.87,107.684 v1(72.897,107.684)
H_2: U9.2 U11.13 | length 14.1
  Layer 2 w0.254: v1(73.017,106.04) 79.102,112.125 v1(80.925,112.125)
  Bottom Layer w0.5: U11.13 71.882,106.032 73.009,106.032 v1(73.017,106.04) ; v1(80.925,112.125) 81.575,112.125 82.1,111.6 83.156,111.6 U9.2
H_3: U5.2 U11.15 | length 12.1
  Bottom Layer w0.5: U11.15 77.425,104.425 79.039,102.811 82.453,102.811 82.723,103.081 U5.2
L_1: U4.3 U11.10 | length 31.1
  Layer 2 w0.254: v1(72.91,108.497) 72.953,108.54 72.953,109.178 74.45,110.675 74.45,117.001 75.901,118.452 80.36,118.452 80.727,118.085 80.727,116.387 80.349,116.009 v1(80.349,115.915)
  Bottom Layer w0.4: v1(80.349,115.915) 77.875,118.389 77.875,120.966 78.109,121.2 81.54,121.2 81.691,121.351 U4.3
  Bottom Layer w0.5: U11.10 71.885,108.435 72.821,108.435 72.883,108.497 v1(72.91,108.497)
L_2: U9.3 U11.12 | length 20.6
  Layer 2 w0.254: v1(72.936,106.845) 72.945,106.845 76.9,110.8 76.9,114.601 77.22,114.921 v1(83.45,114.921)
  Bottom Layer w0.5: U11.12 71.885,106.835 72.925,106.835 v1(72.936,106.845) ; U9.3 83.573,112.851 83.925,113.203 83.925,113.385 84.35,113.81 84.35,114.432 83.88,114.902 83.469,114.902 v1(83.45,114.921)
L_3: U5.3 U11.14 | length 12.4
  Bottom Layer w0.5: U11.14 71.882,105.232 77.608,105.232 79.329,103.511 81.91,103.511 82.75,104.351 U5.3
LED_1: R12.1 U11.27 | length 15.4
  Layer 2 w0.254: v1@56.55,109.85 56.55,106.825 56.598,106.777 56.76,106.777 57.127,106.41 57.127,106.248 58.15,105.225 v1(65.425,105.225)
  Bottom Layer w0.5: R12.1@56.3,109 56.331,109.031 56.331,109.756 v1@56.35,109.775 ; U11.27 v1(65.425,105.225)
  other v1: 56.375,109.675
LED_2: R13.1 U11.28 | length 11.1
  Layer 2 w0.254: v1@60.46,109.215 60.526,109.149 60.526,108.606 60.725,108.407 60.725,106.625 61.325,106.025 v1(65.425,106.025)
  Bottom Layer w0.5: R13.1 60.043,108.85 60.283,109.09 v1(60.31,109.09) ; U11.28 v1(65.425,106.025)
NetC1_2: C1.2 L1.1 U1.3 | length 9.4
  Top Layer w0.6: L1.1 59.135,109.565 57.329,111.371 C1.2 57.632,113.115 U1.3
NetC4_2: C4.2 U1.8 | length 4.4
  Top Layer w0.6: U1.8 67.305,115.655 68.204,116.554 68.204,117.565 C4.2
NetC5_1: C5.1 R4.2 | length 3.3
  Top Layer w0.6: C5.1 70.01,108.902 70.184,108.728 R4.2
NetC5_2: C5.2 U1.6 | length 4
  Top Layer w0.6: U1.6 67.685,113.115 68.06,112.74 68.06,111.984 C5.2
NetC6_1: C6.1 D2.2 U4.5 | length 11.6
  Bottom Layer w0.4: U4.5 87.343,122.621 87.05,122.328 87.05,118.068 87.75,117.368 87.75,116.515 D2.2 91.441,116.511 C6.1
NetC7_1: C7.1 D3.2 U5.5 | length 11.4
  Bottom Layer w0.4: D3.2@87.653,99.332 91.275,99.332 C7.1 ; D3.2 87.741,99.332 87.541,99.532 87.541,100.009 87.404,100.146 87.404,105.387 87.638,105.621 U5.5
NetC10_1: C10.1 D4.2 U9.5 | length 15
  Bottom Layer w0.4: D4.2@85.639,108.525 85.275,108.889 85.275,112.826 85.7,113.251 85.7,113.887 85.934,114.121 U9.5 ; D4.2 90.92,108.536 C10.1@91.105,108.536 ; C10.1@90.99,108.422 C10.1@91.22,108.651 ; C10.1@91.259,108.025 C10.1@91.709,107.575
NetC12_2: C12.2 U11.20 | length 4.5
  Bottom Layer w0.5: U11.20 68.075,101.786 68.15,101.711 68.15,101.5 68.575,101.075 69.061,101.075 70.036,100.1 70.754,100.1 C12.2
NetD1_1: D1.1 R3.2 | length 2.7
  Top Layer w0.6: D1.1 63.265,101.352 63.315,101.402 R3.2
NetD5_1: D5.1 R12.2 | length 2
  Bottom Layer w0.5: R12.2@56.5,110.975 56.714,110.975 56.814,111.075 D5.1@56.814,112.722
NetD6_1: D6.1 R13.2 | length 2.1
  Bottom Layer w0.5: R13.2@59,110.975 59,112.216 59.406,112.622 D6.1@59.487,112.622 ; D6.1@60.012,112.897 D6.1@60.162,113.047
NetD7_1: D7.1 R11.1 | length 2.6
  Bottom Layer w0.4: R11.1 76.071,118.142 D7.1
NetR1_1: R1.1 U1.7 | length 3
  Top Layer w0.6: U1.7 68.2,114.385 68.25,114.435 R1.1
NetR2_1: R2.1 U1.5 | length 9
  Top Layer w0.6: U1.5 65.9,111.845 66.685,111.06 66.685,105.401 67.036,105.05 68.234,105.05 68.234,105.062 R2.1
NetR5_1: R5.1 U4.6 | length 3.1
  Bottom Layer w0.4: U4.6 90.935,121.351 91.284,121.7 R5.1
NetR5_2: R5.2 U2.1 | length 31.9
  Top Layer w0.4: v1(72.725,114.125) 73.575,114.125 U2.1
  Layer 2 w0.254: v1(72.725,114.125) 73.95,115.35 73.95,118.036 75.764,119.85 95.353,119.85 95.387,119.816 95.609,119.816 v1(95.675,119.75)
  Bottom Layer w0.4: R5.2 94.375,122 95.675,120.7 v1(95.675,119.75)
NetR6_1: R6.1 U5.6 | length 3.1
  Bottom Layer w0.4: U5.6 89.851,104.351 90.123,104.623 91.134,104.623 91.284,104.773 R6.1@91.284,105.073
NetR6_2: R6.2 U3.1 | length 20.6
  Top Layer w0.4: U3.1 89.7,114.381 90.869,115.55 95.166,115.55 96.275,114.441 v1(96.275,104.725)
  Bottom Layer w0.4: R6.2 96.146,104.65 96.221,104.725 v1(96.275,104.725)
NetR7_1: R7.1 U4.8 | length 2.9
  Bottom Layer w0.4: U4.8 91.134,118.811 91.284,118.961 R7.1
NetR7_2: R7.2 U6.1 | length 38.6
  Top Layer w0.5: v1(72.9,102.4) 72.927,102.4 72.977,102.45 U6.1
  Layer 2 w0.254: v1(72.9,102.4) 92.8,102.4 93.392,102.992 93.392,116.165 93.2,116.356 v1(93.2,116.45)
  Bottom Layer w0.4: R7.2 93.192,119.171 93.192,116.458 v1(93.2,116.45)
NetR8_1: R8.1 U5.8 | length 3
  Bottom Layer w0.4: U5.8 91.134,101.811 91.284,101.961 R8.1
NetR8_2: R8.2 U7.1 | length 8.5
  Top Layer w0.4: v1(88.45,101) 89.167,101.717 89.769,101.717 90.2,102.148 U7.1
  Bottom Layer w0.4: v1(88.45,101) 88.504,101 88.554,100.95 92.95,100.95 93.184,101.184 R8.2
NetR9_1: R9.1 U9.6 | length 2.9
  Bottom Layer w0.4: U9.6 89.801,112.851 90.486,113.536 R9.1
NetR9_2: R9.2 U8.1 | length 14.6
  Top Layer w0.4: U8.1 81.988,114.288 81.988,115.263 82.346,115.621 v1(82.875,115.621)
  Layer 2 w0.254: v1(82.875,115.621) 91.351,115.621 91.5,115.472 v1(91.5,114.85)
  Bottom Layer w0.4: v1(91.5,114.85) 92.925,114.85 93.184,114.591 R9.2
NetR10_1: R10.1 U9.8 | length 3
  Bottom Layer w0.4: U9.8 91.134,110.311 91.284,110.461 R10.1
NetR10_2: R10.2 U10.1 | length 16.7
  Top Layer w0.4: U10.1 82.225,102.595 82.656,103.026 83.401,103.026 85.473,105.098 86.34,105.098 ccw(c86.34,106.717) 86.42,105.1 87.652,105.1 88.525,105.973 v1(88.525,109.425)
  Bottom Layer w0.4: v1(88.525,109.425) 88.711,109.611 92.38,109.611 93.184,110.415 R10.2
PD2: R15.1 R17.1 R19.1 U11.32 | length 25.2
  Layer 2 w0.254: v1(56.725,100) 55.65,101.075 55.65,110.278 55.849,110.477 60.269,110.477 60.952,109.794 61.306,109.794 61.86,109.24 v1(61.86,109.16)
  Bottom Layer w0.5: v1(56.725,100) 56.706,100.019 56.706,100.7 56.6,100.7 R19.1 R17.1 R15.1 ; v1(61.86,109.16) 61.887,109.16 61.952,109.225 U11.32
PWM: P1.2 U11.16 | length 6.5
  Bottom Layer w0.4: U11.16 74.675,103.625 75.3,103 75.3,100.943 75.119,100.762 P1.2
RESET: C14.2 R21.1 U11.29 | length 20.5
  Layer 2 w0.254: v1(60.723,116.6) 60.773,116.55 60.773,110.615 61.14,110.248 61.659,110.248 62.625,109.282 62.625,106.974 62.774,106.825 v1(65.425,106.825)
  Bottom Layer w0.5: R21.1 57.249,118.8 57.349,118.7 57.349,118.138 58.124,117.362 58.896,117.362 59.639,116.619 60.704,116.619 v1(60.723,116.6) ; U11.29 v1(65.425,106.825)
RX: P2.3 U11.30 | length 18.5
  Layer 2 w0.254: v1(60.5,119.75) 60.594,119.75 61.017,119.327 61.17,119.327 61.35,119.147 61.35,111.425 64.75,108.025 64.75,107.799 64.858,107.691 65.359,107.691 v1(65.425,107.625)
  Bottom Layer w0.4: v1(60.5,119.75) 60.5,119.756 60.894,120.15 P2.3@60.894,121.511
  Bottom Layer w0.5: U11.30 v1(65.425,107.625)
TX: P2.2 U11.31 | length 17.6
  Layer 2 w0.254: v1(62.95,119.85) 62.95,119.756 62.65,119.456 62.65,118.975 64.475,117.15 64.475,112.612 63.225,111.362 63.225,110.625 v1(65.425,108.425)
  Bottom Layer w0.4: P2.2@62.394,121.511 62.394,120.31 62.816,119.888 62.912,119.888 v1(62.95,119.85)
  Bottom Layer w0.5: U11.31 v1(65.425,108.425)
VCC: C1.1 C2.2 C8.2 C9.2 C11.2 D2.1 D3.1 D4.1 pad.@53.5,122.5 R1.2 U1.2 U2.4 U3.4 U4.1 U5.1 U8.4 U9.1 | length 128
  Top Layer w0.6: U1.2 57.356,114.385 C1.1 57.329,117.246 58.124,118.041 C2.2 61.616,122.434 61.55,122.5 ; R1.2 71.499,114.625 71.85,114.976 71.85,122.5
  Top Layer w4: v1(55.5,122.5) 61.55,122.5 71.85,122.5 U3.4@93,122.5 ; U3.4 U3.4@91.986,120.858
  Layer 2 w0.254: v1(71.8,118.286) 71.8,117.65 71.075,116.925 71.075,101.599 71.224,101.45 72.6,101.45 ; v1(76,101.65) 75.906,101.65 75.706,101.45 72.6,101.45 ; v1(80.725,108.6) 80.725,104.725 79.175,103.175 72.788,103.175 72.05,102.437 72.05,102.05 72.6,101.5 72.6,101.45
  Bottom Layer w0.5: v1(76,101.65) 77.239,101.65 77.3,101.711 C9.2 80.622,101.792 83.156,101.792 83.156,100.129 83.953,99.332 D3.1 ; C11.2 82.47,110.564 82.723,110.311 U9.1@82.777,110.311 ; C8.2 80.941,119.016 81.495,119.016 81.911,118.6 82.512,118.6 82.723,118.811 U4.1 ; v1(80.725,108.6) 80.789,108.536 D4.1 ; D4.1@81.745,108.882 82.731,109.867 82.731,110.265 U9.1@82.777,110.311 ; U5.1 U5.1@83.194,101.83 ; U4.1@83.573,118.811 83.619,118.765 83.619,118.367 83.953,118.033 83.953,116.611 84.053,116.611 85.05,115.615 85.05,113.52 84.625,113.096 84.625,111.336 83.633,110.344 83.208,110.344 U9.1 U9.1@82.777,110.311
  other v1: 51.5,121.5 52.5,121.5 53.5,121.5 54.5,121.5 55.5,121.5 51.5,122.5 52.5,122.5 53.5,122.5 54.5,122.5 51.5,123.5 52.5,123.5 53.5,123.5 54.5,123.5 55.5,123.5
X1: R14.1 U11.7 X1.1 | length 10.5
  Bottom Layer w0.4: U11.7 69.675,111.891 69.909,112.125 74.266,112.125 74.5,111.891 74.5,111.075 X1.1 76.716,111.075 76.95,110.841 76.95,110.075 R14.1
X2: R14.2 U11.8 X1.3 | length 7.9
  Bottom Layer w0.4: U11.8 70.475,110.241 70.816,109.9 72.58,109.9 73.177,109.302 73.177,109.298 73.8,108.675 75.3,108.675 75.3,108.359 75.534,108.125 R14.2
pads on no net: BUZ1.0 U1.1 U1.9 U11.1 U11.2 U11.9 U11.17 U11.19 U11.22
copper on no net:
  other v2: 62.2,112.65 63.3,112.65 62.2,113.75 63.3,113.75 62.2,114.85 63.3,114.85

## Polygon pours and split planes (outlines as drawn)
GND on Top Layer "GND_L01_P001" (solid, remove dead copper, pour order 1): 53.375,120.125 53.475,120.025 72.125,120.025 72.125,100.1 69.625,97.6 56.375,97.6 53.325,100.65
GND on Bottom Layer "GND_L04_P000" (solid, pour order 0): 57.844,124.45 95.55,124.45 95.55,95.45 57.77,95.45

## Keep-outs
Keep-Out Layer:
  lines w0.254: 55,101 cw(c54,101) 54,100 51,100 ccw(c51,99) 50,99 50,96 ccw(c51,96) 51,95 101,95 ccw(c101,96) 102,96 102,99 ccw(c101,99) 101,100 98,100 cw(c98,101) 97,101 97,107 cw(c97.5,107) 97.5,107.5 101.5,107.5 ccw(c101.5,108) 102,108 102,112 ccw(c101.5,112) 101.5,112.5 97.5,112.5 cw(c97.5,113) 97,113 97,119 cw(c98,119) 98,120 101,120 ccw(c101,121) 102,121 102,124 ccw(c101,124) 101,125 51,125 ccw(c51,124) 50,124 50,121 ccw(c51,121) 51,120 54,120 cw(c54,119) 55,119 ; 55.025,100.9 55.025,118.9

## Other copper
Top Layer:
  rectangle net FAZ_3: 92,108.477 95.025,115.125
  rectangle net GND: 92.475,95.525 95.8,103.525
  rectangle net FAZ_2: 83.95,108.477 86.975,115.125
  rectangle net GND: 84.5,95.5 87.625,103.5
  rectangle net FAZ_1: 75.925,108.602 78.95,115.25
  rectangle net GND: 76.5,95.5 79.5,103.5
  rectangle net GND: 51.5,95.5 95.5,99.5
  rectangle net GND: 53,97.5 53.5,99.5
Layer 1:
  rectangle net FAZ_2: 93.75,108.125 101.375,112
  rectangle net FAZ_2: 91.25,108.075 95.85,113.45
  rectangle net FAZ_2: 82.125,110.075 95.075,113.45
  rectangle net FAZ_2: 81.95,105.475 87.425,113.4
  rectangle net FAZ_1: 74.15,120.475 101.175,123.85
  rectangle net FAZ_1: 74.15,105.4 79.425,123.85
  rectangle net FAZ_3: 93.25,95.475 101.15,99.5
  rectangle net FAZ_3: 89.625,95.425 95.525,107.55
Bottom Layer:
  rectangle net GND: 52.875,95.55 58.825,99.425

## Silkscreen, mask and mechanical layers (free items; w line width, h text height)
Bottom Overlay:
  text "5V" at 64.146,120.35 h0.4 r90
  text "GND" at 59.646,120.328 h0.4 r90
  text "RX" at 61.125,120.328 h0.4 r90
  text "TX" at 62.6,120.328 h0.4 r90
  text "DTR" at 58.025,120.303 h0.4 r90
  text "++" at 54.95,119.842 h0.5
  text "--" at 54.45,99.525 h0.5
  text "5V" at 73.721,99.025 h0.4 r90
  text "GND" at 76.796,99 h0.4 r90
  text "PWM" at 75.2,98.925 h0.4 r90
Top Solder:
  rectangle: 92.5,95.5 95.825,103.5
  rectangle: 75.95,108.577 78.975,115.225
  rectangle: 83.975,108.452 87,115.1
  rectangle: 92.025,108.452 95.05,115.1
  rectangle: 92.5,95.5 95.5,103.5
  rectangle: 84.5,95.5 87.5,103.5
  rectangle: 76.5,95.5 79.5,103.5
  rectangle: 51.5,95.5 95.5,99.5
  lines w0.3: 55.5,121.5 55.5,121.5
  lines w0.6: 70.15,114.625 71.499,114.625 71.85,114.976 71.85,122.5
  lines w4: 55.5,122.5 71.85,122.5 75.986,122.5 83.986,122.5 93,122.5 ; 91.986,120.477 91.986,120.858